# Allegro board SmartRing.brd
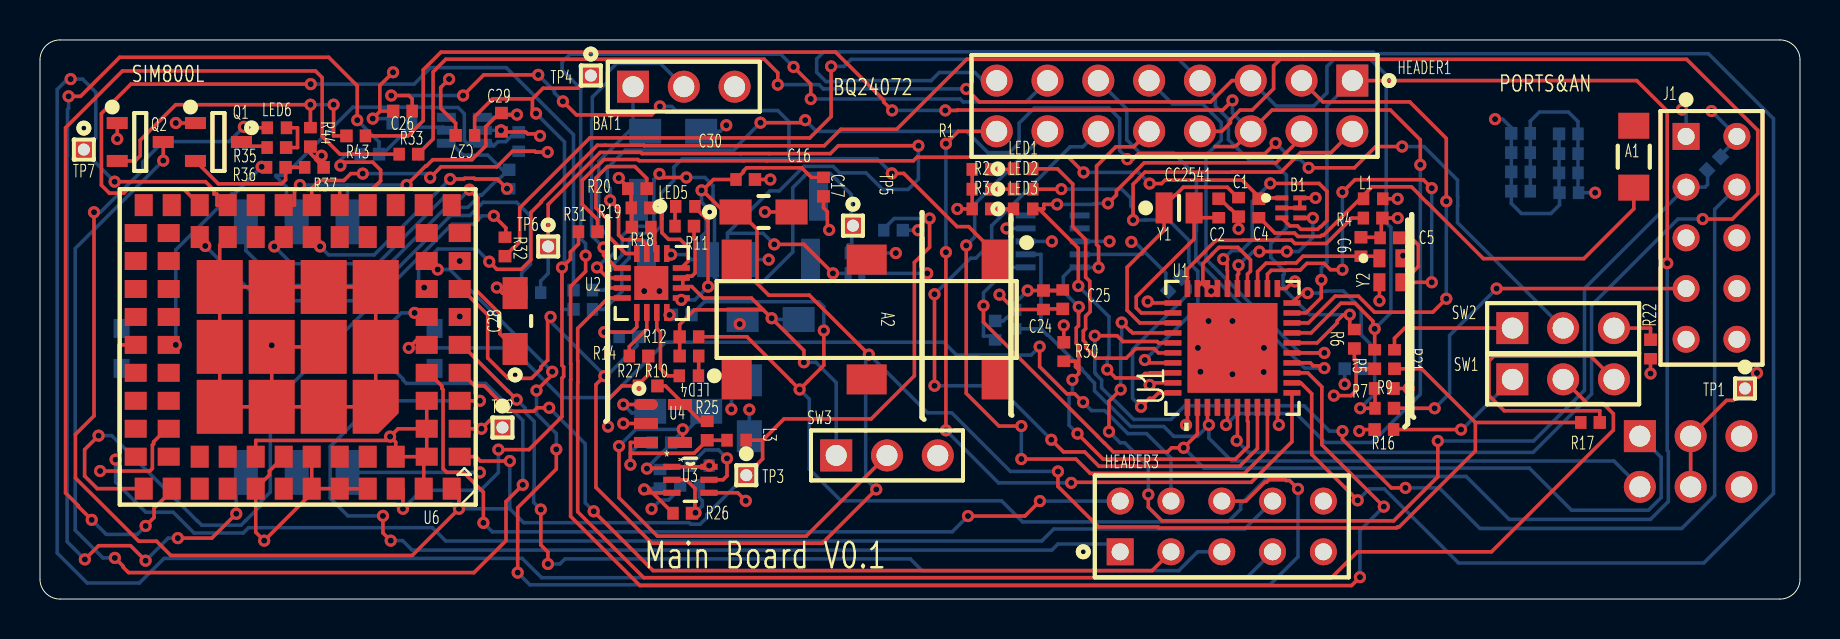
[diagram p0: board, top side]
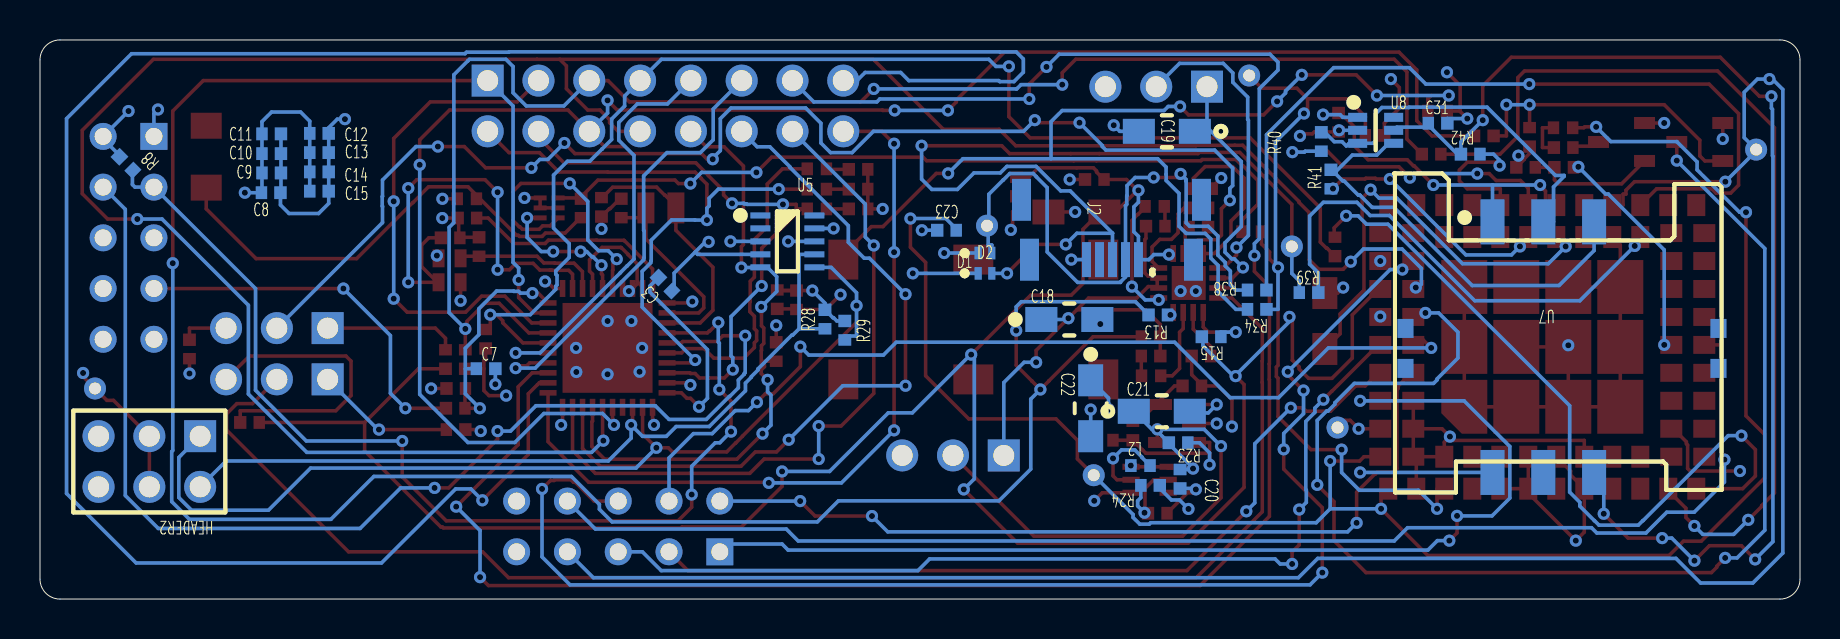
[diagram p1: board, bottom side, seen from below]

Outline 88 x 28 mm; copper layers: TOP, GND, POWER, BOTTOM. Coordinates in mm from the lower left corner of the outline.
Outline path: 0,27 arc(0.29,27.71) 1,28 87,28 arc(87.71,27.71) 88,27 88,1 arc(87.71,0.29) 87,0 1,0 arc(0.29,0.29) 0,1 0,27

## Placement (name value [footprint] x y rotation side)
A1  AN_SMD  [ANSMD3216]  79.69 22.15 90 top
A2  AN_SMD  [ANSMD_RAINSUN]  41.33 14 270 top
B1  Balun_LFB182G45BG2D280  [LFB182G45BG2D280]  62.54 19.59 0 top
BAT1  3.7V-LiPo  [BAT]  29.65 25.66 0 top
C1  15pF  [C0402]  59.93 19.61 270 top
C2  15pF  [C0402]  58.94 19.59 90 top
C3  1uF  [C0402]  56.75 15.78 45 bottom
C4  1.2pF  [C0402]  60.94 19.59 90 top
C5  12pF  [C0402]  67.5 18.09 0 top
C6  12pF  [C0402]  66.05 17.66 90 top
C7  1nF  [C0402]  65.69 11.54 180 bottom
C8  100nF  [C0402]  76.44 20.35 180 bottom
C9  100nF  [C0402]  76.41 21.34 180 bottom
C10  100nF  [C0402]  76.41 22.31 180 bottom
C11  100nF  [C0402]  76.41 23.3 180 bottom
C12  200pF  [C0402]  74.02 23.32 180 bottom
C13  2.2uF  [C0402]  74.02 22.36 180 bottom
C14  1uF  [C0402]  74.02 21.39 180 bottom
C15  100nF  [C0402]  74.02 20.43 180 bottom
C16  10uF/16V  [3216-18]  36.18 19.38 0 top
C17  0.1uF  [C0402]  39.18 20.63 270 top
C18  10uF/6.3V  [3216-18]  36.53 14 180 bottom
C19  10uF/6.3V  [3216-18]  31.66 23.42 0 bottom
C20  0.1uF  [C0402]  31 6 270 bottom
C21  10uF/6.3V  [3216-18]  31.91 9.4 180 bottom
C22  10uF/6.3V  [3216-18]  35.47 9.55 270 bottom
C23  0.1uF  [C0402]  42.68 18.47 0 bottom
C24  0.1uF  [C0402]  50.17 14.99 90 top
C25  0.1uF  [C0402]  51.14 14.99 270 top
C26  ?nF  [C0402]  18.12 24.44 180 top
C27  ?nF  [C0402]  21.24 23.22 180 top
C28  100uF/6.3V  [3216-18]  23.76 13.92 90 top
C29  1uF  [C0402]  23.07 23.88 90 top
C30  0.1uF  [C0402]  35.29 21.01 0 top
C31  22pF  [C0402]  18.09 23.83 180 bottom
D1  NM  [PESD5V0S1BL]  40.75 17.33 180 bottom
D2  NM  [PESD5V0S1BL]  40.75 16.31 180 bottom
HEADER1  PORTS  [HEADER8X2]  65.62 25.96 180 top
HEADER2  POWER  [HEADER3X2]  79.99 8.16 0 bottom
HEADER3  HEADER2x5  [HEADER5X2_1]  54.01 2.37 0 top
J1  CC_Debugger  [HEADER5X2_1]  82.3 23.17 270 top
J2  USB_MINI  [MICROUSB]  34.43 19.99 90 bottom
L1  ? nH  [L0402]  66.66 20.05 180 top
L2  4.7uH  [L0402]  32.98 6.68 180 bottom
L3  4.7uH  [L0402]  34.83 7.95 0 top
LED1  RED  [LED0402]  49.16 21.54 0 top
LED2  GRE  [LED0402]  49.16 20.53 0 top
LED3  BLU  [LED0402]  49.16 19.54 0 top
LED4  RED  [LED0402]  32.44 11.18 180 top
LED5  YEL  [LED0402]  32.27 19.66 0 top
LED6  GRE  [LED0402]  11.84 23.6 0 top
NOREF  -  []  1 28 0 top
NOREF#2  -  []  88 1 90 top
Q1  -  [S9013-SOT-23]  8.92 22.89 0 top
Q2  -  [S9013-SOT-23]  5.01 22.89 0 top
R1  330R  [R0402]  47.1 21.52 0 top
R2  330R  [R0402]  47.1 20.53 0 top
R3  330R  [R0402]  47.1 19.54 0 top
R4  56K-1%  [R0402]  66.66 19.08 0 top
R5  4.7K  [R0402]  66.73 11.99 270 top
R6  4.7K  [R0402]  65.72 13.01 270 top
R7  2K7  [R0402]  67.22 10.55 0 top
R8  10K  [R0402]  83.7 21.82 45 bottom
R9  2K7  [R0402]  67.24 9.55 0 top
R10  10K  [R0402]  32.44 12.17 180 top
R11  10K  [R0402]  32.24 18.67 0 top
R12  10K  [R0402]  32.44 13.14 180 top
R13  20K  [R0402]  32.11 14.23 0 bottom
R14  1K  [R0402]  29.95 12.17 0 top
R15  10K  [R0402]  29.45 13.14 0 bottom
R16  1K  [R0402]  67.19 8.49 180 top
R17  10K  [R0402]  77.53 8.84 0 top
R18  46.4K-1%  [R0402]  30.06 18.62 180 top
R19  1.18K-1%  [R0402]  30.06 19.59 0 top
R20  1.13K-1%  [R0402]  29.88 20.55 0 top
R21  10K  [R0402]  67.72 11.99 270 top
R22  1K  [R0402]  80.53 12.53 90 top
R23  ?R  [R0402]  31.1 7.83 0 bottom
R24  124K-1%  [R0402]  32.47 5.69 180 bottom
R25  4.99K-1%  [R0402]  33.36 8.41 270 top
R26  27K-1%  [R0402]  32.14 4.3 0 top
R27  1K-1%  [R0402]  30.41 10.67 0 top
R28  4.7K  [R0402]  48.75 14.03 90 bottom
R29  4.7K  [R0402]  47.76 13.47 90 bottom
R30  4.7K  [R0402]  51.19 12.4 90 top
R31  0R  [R0402]  27.41 18.39 0 top
R32  22R  [R0402]  23.25 17.63 270 top
R33  22R  [R0402]  18.45 22.28 0 top
R34  ?R  [R0402]  27.14 14.51 180 bottom
R35  1K  [R0402]  11.84 22.61 0 top
R36  1K  [R0402]  11.82 21.62 0 top
R37  10K  [R0402]  13.72 21.62 0 top
R38  22R  [R0402]  27.14 15.47 180 bottom
R39  22R  [R0402]  24.54 15.35 180 bottom
R40  22R  [R0402]  23.94 22.92 90 bottom
R41  22R  [R0402]  23.45 21.04 90 bottom
R42  22R  [R0402]  16.49 22.28 0 bottom
R43  1K  [R0402]  15.78 23.19 180 top
R44  10K  [R0402]  13.52 23.12 270 top
SW1  BQ24072_nCE  [SW]  73.62 11 0 top
SW2  BQ24072_TD  [SW]  73.62 13.57 0 top
SW3  ON/OFF  [SW]  39.81 7.19 0 top
TP1  TP  [TP1]  85.25 10.55 0 top
TP2  TP  [TP1]  23.12 8.59 0 top
TP3  TP  [TP1]  35.31 6.2 0 top
TP4  TP  [TP1]  27.54 26.22 0 top
TP5  TP  [TP1]  40.65 18.7 0 top
TP6  TP  [TP1]  25.41 17.66 0 top
TP7  TP  [TP1]  2.19 22.51 0 top
U1  CC2541-VQFN  [CC2541]  59.62 12.58 90 top
U2  BQ24072-QFN  [BQ24072]  30.59 15.83 0 top
U3  -  [TPS61220DCKR]  32.52 5.97 0 top
U4  MAX8515  [MAX8515AEXK-T]  31.15 8.79 0 top
U5  MC3200-VQFN  [MC3210]  50.63 17.91 180 bottom
U6  -  [SIM800L]  12.89 12.63 180 top
U7  SIM_Card  [SIMCARD]  12.89 12.55 90 bottom
U8  -  [SMF05C]  21.22 23.47 180 bottom
Y1  32.768KHz  [Y_FC_12M]  56.96 19.59 0 top
Y2  32MHz  [FA-118T]  67.52 16.46 0 top

## Library data of the parts
A1 = AN_SMD_1
A2 = AN_SMD_0
B1 = Balun_LFB182G45BG2D280
BAT1 = BAT-LiPo
C1-C15 C17 C20 C23-C27 C29-C31 = CAP-NP
C16 C18 C19 C21 C22 C28 = CAP-POL
D1 D2 = D_ZENER
HEADER1 = HEADER2x8
HEADER2 = HEADER2x3
HEADER3 = HEADER2x5
J1 = CC_Debugger
J2 = USB_MINI
L1-L3 = L
LED1-LED6 = LED
Q1 Q2 = NPN
R1-R44 = R
SW1 SW2 = Switch_1
SW3 = Switch
TP1-TP7 = TP
U1 = CC2541
U2 = BQ24072
U3 = TPS6122x
U4 = MAX8515
U5 = MC3210
U6 = SIM800L
U7 = SIM_Card
U8 = SMF05C
Y1 = Crystal_2PIN
Y2 = Crystal_4PIN_US

## Footprints (pads in the part's own frame, mm; a bottom-side part is the same pattern mirrored in y, then rotated)
3216-18
  rect 1.6x1.25 smd: 1(-1.4,0) 2(1.4,0)
ANSMD3216
  rect 1.3x1.55 smd: 1(-1.55,0) 2(1.55,0)
ANSMD_RAINSUN
  rect 2x1.5 smd: 1(-3,6.5) 3(-3,-6.5) 4(3,-6.5) 6(3,6.5)
  rect 1.5x2 smd: 2(-3,0) 5(3,0)
BAT
  rect 1.6x1.6 hole 1.05: 1(0,0)
  round 1.6 hole 1.05: 2(2.54,0) 3(5.08,0)
BQ24072
  rect 0.85x0.28 smd: 1(-1.475,0.75) 2(-1.475,0.25) 3(-1.475,-0.25) 4(-1.475,-0.75) 9(1.475,-0.75) 10(1.475,-0.25) 11(1.475,0.25) 12(1.475,0.75)
  rect 0.28x0.85 smd: 5(-0.75,-1.475) 6(-0.25,-1.475) 7(0.25,-1.475) 8(0.75,-1.475) 13(0.75,1.475) 14(0.25,1.475) 15(-0.25,1.475) 16(-0.75,1.475)
  rect 1.7x1.7 smd: 17(-0.025,0)
C0402
  rect 0.57x0.64 smd: 1(-0.49,0)
  rect 0.62x0.64 smd: 2(0.46,0)
CC2541
  rect 0.85x0.28 smd: 1(-2.975,2.25) 2(-2.975,1.75) 3(-2.975,1.25) 4(-2.975,0.75) 5(-2.975,0.25) 6(-2.975,-0.25) 7(-2.975,-0.75) 8(-2.975,-1.25) 9(-2.975,-1.75) 10(-2.975,-2.25) 21(2.975,-2.25) 22(2.975,-1.75) 23(2.975,-1.25) 24(2.975,-0.75) 25(2.975,-0.25) 26(2.975,0.25) 27(2.975,0.75) 28(2.975,1.25) 29(2.975,1.75) 30(2.975,2.25)
  rect 0.28x0.85 smd: 11(-2.25,-2.975) 12(-1.751,-2.975) 13(-1.25,-2.975) 14(-0.75,-2.975) 15(-0.25,-2.975) 16(0.25,-2.975) 17(0.75,-2.975) 18(1.25,-2.975) 19(1.751,-2.975) 20(2.25,-2.975) 31(2.25,2.975) 32(1.751,2.975) 33(1.25,2.975) 34(0.75,2.975) 35(0.25,2.975) 36(-0.25,2.975) 37(-0.75,2.975) 38(-1.25,2.975) 39(-1.751,2.975) 40(-2.25,2.975)
  rect 4.5x4.5 smd: 41(0,0)
FA-118T
  rect 0.6x0.9 smd: 1(-0.55,0.6) 2(-0.55,-0.6) 3(0.55,-0.6) 4(0.55,0.6)
HEADER3X2
  rect 1.6x1.6 hole 1.05: 1(0,0)
  round 1.6 hole 1.05: 2(0,2.54) 3(2.54,0) 4(2.54,2.54) 5(5.08,0) 6(5.08,2.54)
HEADER5X2_1
  rect 1.35x1.35 hole 0.85: 1(0,0)
  round 1.35 hole 0.85: 2(0,2.54) 3(2.54,0) 4(2.54,2.54) 5(5.08,0) 6(5.08,2.54) 7(7.62,0) 8(7.62,2.54) 9(10.16,0) 10(10.16,2.54)
HEADER8X2
  rect 1.6x1.6 hole 1.05: 1(0,0)
  round 1.6 hole 1.05: 2(0,2.54) 3(2.54,0) 4(2.54,2.54) 5(5.08,0) 6(5.08,2.54) 7(7.62,0) 8(7.62,2.54) 9(10.16,0) 10(10.16,2.54) 11(12.7,0) 12(12.7,2.54) 13(15.24,0) 14(15.24,2.54) 15(17.78,0) 16(17.78,2.54)
L0402
  rect 0.57x0.64 smd: 1(-0.48,0) 2(0.48,0)
LED0402
  rect 0.57x0.64 smd: 1(-0.48,0) 2(0.48,0)
LFB182G45BG2D280
  rect 0.65x0.25 smd: 1(-0.45,0.5) 2(-0.45,0) 3(-0.45,-0.5) 4(0.45,-0.5) 5(0.45,0) 6(0.45,0.5)
MAX8515AEXK-T
  oval 1.2x0.55 smd: 1(-0.85,0.95)
  rect 1.2x0.55 smd: 2(-0.85,0) 3(-0.85,-0.95) 4(0.85,-0.95) 5(0.85,0.95)
MC3210
  rect 1x0.3 smd: 1(-1.35,1.3) 2(-1.35,0.65) 3(-1.35,0) 4(-1.35,-0.65) 5(-1.35,-1.3) 6(1.35,-1.3) 7(1.35,-0.65) 8(1.35,0) 9(1.35,0.65) 10(1.35,1.3)
MICROUSB
  rect 2.1x0.95 smd: (-3,-4.1) (-3,4.1) (0,-4.5) (0,4.5)
  rect 1.75x0.45 smd: 1(-2.998,-1.347) 2(-2.995,-0.7) 3(-2.995,-0.05) 4(-2.995,0.6) 5(-2.995,1.25)
PESD5V0S1BL
  rect 0.36x0.63 smd: 1(-0.34,0) 2(0.34,0)
R0402
  rect 0.57x0.64 smd: 1(-0.49,0)
  rect 0.62x0.64 smd: 2(0.46,0)
S9013-SOT-23
  rect 1.05x0.6 smd: 1(-1.15,0.95) 2(-1.15,-0.95) 3(1.15,0)
SIM800L
  rect 1.1x0.9 smd: 1(-8.1,5.5) 2(-8.1,4.1) 3(-8.1,2.7) 4(-8.1,1.3) 5(-8.1,-0.1) 6(-8.1,-1.5) 7(-8.1,-2.9) 8(-8.1,-4.3) 9(-8.1,-5.7) 22(8.1,-5.7) 23(8.1,-4.3) 24(8.1,-2.9) 25(8.1,-1.5) 26(8.1,-0.1) 27(8.1,1.3) 28(8.1,2.7) 29(8.1,4.1) 30(8.1,5.5) 43(-6.45,5.5) 44(-6.45,4.1) 45(-6.45,2.7) 46(-6.45,1.3) 47(-6.45,-0.1) 48(-6.45,-1.5) 49(-6.45,-2.9) 50(-6.45,-4.3) 51(-6.45,-5.7) 60(6.45,-5.7) 61(6.45,-4.3) 62(6.45,-2.9) 63(6.45,-1.5) 64(6.45,-0.1) 65(6.45,1.3) 66(6.45,2.7) 67(6.45,4.1) 68(6.45,5.5)
  rect 0.9x1.1 smd: 10(-7.7,-7.1) 11(-6.3,-7.1) 12(-4.9,-7.1) 13(-3.5,-7.1) 14(-2.1,-7.1) 15(-0.7,-7.1) 16(0.7,-7.1) 17(2.1,-7.1) 18(3.5,-7.1) 19(4.9,-7.1) 20(6.3,-7.1) 21(7.7,-7.1) 31(7.7,7.1) 32(6.3,7.1) 33(4.9,7.1) 34(3.5,7.1) 35(2.1,7.1) 36(0.7,7.1) 37(-0.7,7.1) 38(-2.1,7.1) 39(-3.5,7.1) 40(-4.9,7.1) 41(-6.3,7.1) 42(-7.7,7.1) 52(-4.9,-5.5) 53(-3.5,-5.5) 54(-2.1,-5.5) 55(-0.7,-5.5) 56(0.7,-5.5) 57(2.1,-5.5) 58(3.5,-5.5) 59(4.9,-5.5) 69(4.9,5.5) 70(3.5,5.5) 71(2.1,5.5) 72(0.7,5.5) 73(-0.7,5.5) 74(-2.1,5.5) 75(-3.5,5.5) 76(-4.9,5.5)
  custom 2.3x2.7 smd: 77(-3.9,3)
  rect 2.3x2.7 smd: 78(-3.9,0) 79(-3.9,-3) 80(-1.3,-3) 81(1.3,-3) 82(3.9,-3) 83(3.9,0) 84(3.9,3) 85(1.3,3) 86(-1.3,3) 87(-1.3,0) 88(1.3,0)
SIMCARD
  rect 0.95x0.8 smd: (-1,-8.81) (-1,6.84) (1,-8.81) (1,6.84)
  rect 2.25x1.2 smd: 1(6.338,2.489) 2(6.338,-0.051) 3(6.338,-2.591) 4(-6.211,2.489) 5(-6.211,-0.051) 6(-6.211,-2.591)
SMF05C
  rect 0.95x0.45 smd: 1(-0.9,0.65) 2(-0.9,0) 3(-0.9,-0.65) 4(0.9,-0.65) 5(0.9,0) 6(0.9,0.65)
SW
  rect 1.6x1.6 hole 1.05: 1(0,0)
  round 1.6 hole 1.05: 2(2.54,0) 3(5.08,0)
TP1
  round 1.1 hole 0.6: 1(0,0)
TPS61220DCKR
  rect 0.864x0.305 smd: 1(-0.927,0.65) 2(-0.927,0) 3(-0.927,-0.65) 4(0.927,-0.65) 5(0.927,0) 6(0.927,0.65)
Y_FC_12M
  rect 0.85x1.55 smd: 1(-0.75,0) 2(0.75,0)

## Nets
DGND: B1.2 B1.5 B1.6 BAT1.3(GND) C1.2 C2.2 C3.1 C5.1 C6.2 C7.2 C8.2 C9.2 C10.2 C11.2 C12.2 C13.2 C14.2 C15.2 C16.2 C17.2 C18.2 C19.2 C20.2 C21.2 C22.2 C23.2 C24.1 C25.2 C26.2 C27.2 C28.2 C29.1 C30.2 C31.2 D1.1(ANODE) D2.1(ANODE) HEADER2.5 HEADER2.6 HEADER3.9 HEADER3.10 J1.1(GND) J2.5(GND) L1.1 Q1.1(EMITTER) Q2.1(EMITTER) R4.2 R13.1 R14.2 R16.2 R18.2 R19.1 R20.1 R22.1 R26.1 R27.1 R37.2 R44.2 TP2.1 U1.1(GND#1) U1.41(GND#41) U2.8(VSS) U2.17(GNDPAD) U3.3(GND) U4.1(PGND) U4.2(GND) U5.4(VPP) U5.8(GND) U6.2(GND#2) U6.6(GND#6) U6.8(GND#8) U6.35(GND#35) U6.37(GND#37) U6.38(GND#38) U6.39(GND#39) U6.41(GND#41) U6.43(GND#43) U6.44(GND#44) U6.45(GND#45) U6.58(GND#58) U6.67(GND#67) U6.71(GND#71) U6.72(GND#72) U6.73(GND#73) U6.76(GND#76) U6.77(GND#77) U6.78(GND#78) U6.79(GND#79) U6.80(GND#80) U6.81(GND#81) U6.82(GND#82) U6.83(GND#83) U6.84(GND#84) U6.85(GND#85) U6.86(GND#86) U6.87(GND#87) U6.88(GND#88) U7.4(GND) U8.2 Y2.2 Y2.4
DVDD2V8: C8.1 C9.1 C10.1 C11.1 C12.1 C13.1 C14.1 C15.1 C22.1 C24.2 C25.1 HEADER2.3 HEADER2.4 J1.2(VCC) R1.1 R2.1 R3.1 R5.2 R6.2 R7.2 R8.2 R24.2 R28.2 R29.2 R30.2 TP1.1 U1.10(DVDD2) U1.21(AVDD5) U1.24(AVDD3) U1.27(AVDD2) U1.28(AVDD1) U1.29(AVDD4) U1.31(AVDD6) U1.39(DVDD1) U3.4(VOUT) U5.3(AVDD) U5.9(DVDD)
DVDD3V6: C23.1 L3.2 LED6.1(ANODE) TP3.1 U6.1(VBAT#1) U6.42(VBAT#42)
VDDEXT: HEADER3.7 TP7.1 U6.18(VDDEXT)
ADC: HEADER3.6 U6.50(ADC)
BAT: C18.1 R10.2 R11.2 R12.2 SW3.1(COMMON) U2.10(OUT_1) U2.11(OUT_2)
BAT_ADC: HEADER1.1 R12.1 R13.2 U1.19(P0_0)
BAT_IN: C20.1 C21.1 L2.1 R23.2 SW3.2(NC) U3.1(VIN) U3.6(EN) U4.4(IN)
BPI_BUS: HEADER3.5 U6.5(BPI_BUS)
BQ24072_NCE: SW1.2 U2.4(C\E\)
BQ24072_TD: SW2.2 U2.15(TD)
BT_ANT: B1.1 C4.2 R31.2
CC2541_RF_N: B1.3 U1.26(RF_N)
CC2541_RF_P: B1.4 U1.25(RF_P)
CHG: LED5.2(CATHODE) U2.9(C\H\G\)
DC: J1.3(DC) R8.1 U1.34(P2_2/DC)
DD: J1.4(DD) U1.35(P2_1/DD)
GPIO1: HEADER3.1 U6.3(GPIO1)
MC3210_INT: HEADER1.10 R30.1 U1.7(P1_3) U5.5(INTN)
MC3210_SCK: HEADER2.1 R29.1 U1.2(SCL) U5.6(SCK)
MC3210_SDA: HEADER2.2 R28.1 U1.3(SDA) U5.7(SDA)
NRST: J1.7(NRST) R9.2
P0_1/AD1: HEADER1.3 U1.18(P0_1)
P0_4/AD4: HEADER1.9 U1.15(P0_4)
P0_5/AD5: HEADER1.11 U1.14(P0_5)
P0_6/AD6: HEADER1.13 U1.13(P0_6)
P0_7/AD7: HEADER1.15 U1.12(P0_7)
P1_0: HEADER1.16 U1.11(P1_0)
P1_1: HEADER1.14 U1.9(P1_1)
P1_2: HEADER1.12 U1.8(P1_2)
P1_6: HEADER1.4 LED3.2(CATHODE) U1.38(P1_6)
P1_7: HEADER1.2 LED2.2(CATHODE) U1.37(P1_7)
P2_0: LED1.2(CATHODE) U1.36(P2_0)
PG: LED4.2(CATHODE) U2.7(P\G\)
PWM: HEADER3.8 U6.26(PWM)
SIM800_PK: HEADER1.6 R43.1 U1.5(P1_5)
SIM800_RST: HEADER1.8 U1.6(P1_4) U6.49(RESET)
SIM800_RXD: R32.1 U6.31(RXD)
SIM800_TXD: R33.1 U6.32(TXD)
SIM_CLK: R41.2 U7.3(CLK) U8.4
SIM_DATA: C31.1 R42.2 U7.6(IO) U8.5
SIM_RST: R40.2 U7.2(RST) U8.3
SINK0: HEADER3.4 U6.47(ISINK0)
SINK1: HEADER3.2 U6.46(ISINK1)
STATUS: HEADER3.3 U6.4(STATUS)
USART_RXD: HEADER1.5 R5.1 R33.2 U1.17(P0_2)
USART_TXD: HEADER1.7 R6.1 R32.2 U1.16(P0_3)
USB_5V: C16.1 C17.1 C30.1 J2.1(VBUS) R15.2 R17.1 R21.2 U2.13(IN) U6.7(VBUS)
USB_DM: D1.2(CATHODE) J2.2(D-) R38.1 TP5.1
USB_DP: D2.2(CATHODE) J2.3(D+) R39.1 TP6.1
VSIM: C29.2 U6.16(VSIM) U7.1(VCC) U8.1
N12835: C1.1 U1.33(P2_3/OSC32K_Q2) Y1.1
N12841: C2.1 U1.32(P2_4/OSC32K_Q1) Y1.2
N13149: R4.1 U1.30(RBIAS)
N13333: C3.2 U1.40(DCOUPL)
N14357: C6.1 U1.23(XOSC_Q2) Y2.1
N14367: C5.2 U1.22(XOSC_Q1) Y2.3
N19377: C7.1 R7.1 R9.1 U1.20(RST_N)
N42343: A1.1(ANT) C4.1 L1.2
N47831: R24.1 R26.2 U3.2(FB)
N59946: Q2.3(COLLECTOR) U6.48(PWRKEY)
N60165: Q2.2(BASE) R43.2 R44.1
N62144: R38.2 U6.19(USB_DM)
N62148: R39.2 U6.59(USB_DP)
N62630: R42.1 U6.14(SIM_DATA)
N62665: R41.1 U6.55(SIM_CLK)
N62680: R40.1 U6.15(SIM_RST)
N65838: R36.1 U6.64(NETLIGHT)
N65858: Q1.2(BASE) R36.2 R37.1
N67494: A2.1(ANT) C26.1 R34.1
N67529: C27.1 R31.1 R34.2 TP4.1 U6.40(ANT)
N77579: L3.1 R23.1 R25.2 U4.3(OUT)
N88391: LED2.1(ANODE) R2.2
N88395: LED1.1(ANODE) R1.2
N88411: LED3.1(ANODE) R3.2
N122459: BAT1.1(BAT+) C19.1 U2.2(BAT_1) U2.3(BAT_2)
N122468: BAT1.2(TS) U2.1(TS)
N122830: R15.1 U2.5(EN2)
N123132: R14.1 U2.6(EN1)
N128065: LED5.1(ANODE) R11.1
N128069: LED4.1(ANODE) R10.1
N477050: L2.2 U3.5(L)
N546190: R19.2 U2.12(ILIM)
N547230: R20.2 U2.16(ISET)
N547391: R18.1 U2.14(TMR)
N658042: Q1.3(COLLECTOR) R35.1
N659580: LED6.2(CATHODE) R35.2
N773363: R25.1 R27.2 U4.5(FB)
N1023186: C28.1 U6.56(VRTC)
N1278610: R16.1 SW1.1
N1278612: R17.2 SW1.3
N1284310: R21.1 SW2.1
N1284312: R22.2 SW2.3

Pads without a net: A1 2; A2 2 3 4 5 6; J1 5 6 8 9 10; J2 4; SW3 3; U1 4; U5 1 2 10; U6 9 10 11 12 13 17 20 21 22 23 24 25 27 28 29 30 33 34 36 51 52 53 54 57 60 61 62 63 65 66 68 69 70 74 75; U7 5; U8 6

## Via types
v1: diameter 0.61, hole 0.305, TOP to BOTTOM, 256 vias

## Routing (per net, layer and track width the routed paths; a pad name or vN(x,y) marks a point on that pad's centre or on a via; arc(x,y) is an arc through that point)
DGND: length 205.4
  TOP w0.178: 16.99,24.44 C26.2 ; 16.99,24.44 16.99,25.72 v1(17.65,26.38) ; 16.99,24.44 16.99,24.42 v1(16.64,24.06) ; U6.37 13.59,5.3 v1(11.21,2.93) 10.79,3.35 U6.35 11.47,6.21 11.47,6.41 U6.72 ; U6.37 U6.73 ; U6.37 U6.38 U6.39 16.04,5.19 16.04,5.19 ; 59.22,12.58 v1(57.89,12.58) ; 59.22,12.58 v1(58.02,11.38) ; 59.22,12.58 U1.41 ; v1(36.52,21.01) C30.2 ; C17.2 39.18,19.59 39.37,19.4 39.37,18.58 v1(39.46,18.49) ; v1(67.89,19.08) R4.2 67.06,19.03 67.06,18.18 67.01,18.12 ; v1(3.01,6.41) 5.49,6.41 5.62,6.54 5.62,7.71 5.68,7.77 5.68,7.87 6.34,8.53 U6.67 ; v1(25,23.19) 24.9,23.3 24.38,23.3 24.29,23.39 C29.1 23.05,23.41 v1(23.05,23.47) ; U6.2 v1(22.07,8.53) 22.49,8.95 22.76,8.95 TP2.1 ; U6.82 U6.83 U6.84 U6.85 ; U6.82 U6.81 U6.80 U6.79 U6.78 U6.77 U6.86 U6.85 ; U6.82 8.99,17.73 U6.58 ; v1(65.96,8.41) 66.04,8.49 R16.2 ; 30.22,5.49 v1(30.21,5.49) ; 30.22,5.49 30.46,5.49 R26.1 ; 30.22,5.49 30.39,5.32 U3.3 ; v1(31.48,14.23) 31.35,14.35 U2.8 ; U1.41 v1(59.62,11.26) ; U1.41 60.94,11.61 ; U1.41 59.62,12.73 ; U1.41 59.98,12.58 ; U6.85 U6.88 ; U6.88 v1(11.59,12.71) ; U6.88 U6.87 ; U6.43 19.19,6.98 U6.41 ; U6.43 U6.76 17.79,7.85 v1(17.5,8.14) ; U6.43 U6.44 ; v1(28.4,8.64) 28.4,9.98 29.09,10.67 R27.1 29.98,10.73 29.98,10.8 30.41,11.23 R14.2 ; C25.2 50.17,14.53 C24.1 48.72,14.5 v1(47.97,15.24) ; U6.45 U6.44 ; U6.44 17.9,8.53 v1(17.5,8.14) ; C5.1 67.01,18.12 ; 67.01,18.12 C6.2 ; v1(63.78,20.09) B1.6 B1.5 B1.2 ; v1(68.16,17.2) 68.07,17.12 Y2.4 ; C28.2 23.12,15.32 v1(22.84,15.6) ; C27.2 20.78,23.83 20.03,24.58 20.03,25.62 v1(20.46,26.04) ; C2.2 59,20.05 59.5,19.55 59.53,19.55 C1.2 v1(59.93,18.54) ; R18.2 29.6,19.56 R19.1 29.57,20.38 R20.1 29.39,20.64 v1(28.94,21.09) ; 59.98,12.58 v1(61.2,12.58) ; 59.98,12.58 60.94,11.61 ; R44.2 13.52,22.32 13.79,22.05 13.79,22.02 R37.2 14.18,22.1 v1(14.08,22.2) ; 59.62,12.73 v1(59.62,13.92) ; 59.62,12.73 v1(58.43,13.92) ; 60.94,11.61 v1(61.18,11.37) ; U6.6 v1(20.99,14.15) ; U1.1 57.37,8.79 v1(57.3,8.72) ; v1(17.5,8.14) 17.31,7.95 10.79,7.95 U6.71 ; Y2.2 v1(66.97,14.94) ; v1(30.21,15.42) 30.31,15.52 30.31,15.57 U2.17 v1(30.97,15.42) ; Q2.1 v1(3.86,23.04) ; R22.1 v1(80.53,11.29) ; Q1.1 v1(6.79,23.84) ; U4.2 v1(29.17,8.79) ; L1.1 v1(67.88,20.05) ; C16.2 v1(36.24,19.38) ; U4.1 v1(29.17,9.74)
  GND w0.178: 34.73,24.6 BAT1.3 ; BAT1.3 34.73,26.71 ; BAT1.3 33.68,25.66 ; BAT1.3 35.78,25.66 ; HEADER2.5 86.13,8.16 ; HEADER2.5 84.02,8.16 ; HEADER2.5 85.07,9.21 ; HEADER2.5 85.07,7.1 ; 22.08,23.5 22.19,23.39 24.29,23.39 24.38,23.3 24.9,23.3 v1(25,23.19) ; 64.17,3.98 HEADER3.10 ; HEADER3.10 63.24,4.91 ; HEADER3.10 64.17,5.84 ; HEADER3.10 65.1,4.91 ; 82.3,22.24 J1.1 ; J1.1 83.23,23.17 ; J1.1 82.3,24.1 ; J1.1 81.38,23.17 ; HEADER2.6 85.07,6.67 ; HEADER2.6 86.13,5.62 ; HEADER2.6 85.07,4.56 ; HEADER2.6 84.02,5.62 ; TP2.1 23.12,9.39 ; TP2.1 22.32,8.59 ; TP2.1 23.93,8.59 ; 64.17,1.44 HEADER3.9 ; HEADER3.9 64.17,3.3 ; HEADER3.9 65.1,2.37 ; HEADER3.9 63.24,2.37 ; 30.01,15.42 v1(30.21,15.42) v1(30.97,15.42)
  BOTTOM w0.178: v1(54.57,17.89) 54.73,17.89 55.24,17.38 ; U8.2 v1(23.05,23.47) ; C7.2 v1(65.23,10.76) ; v1(34.98,13.77) 35.13,13.92 C18.2 ; C23.2 v1(43.91,18.47) ; v1(29.17,9.74) 29.59,9.32 30.43,9.32 C21.2 ; R13.1 v1(31.48,14.23) ; v1(34.31,23.73) 34.01,23.42 C19.2 ; U5.4 55.12,17.26 55.24,17.38 ; D2.1 v1(44.36,16.31) ; 55.24,17.38 56.29,16.33 56.29,15.43 C3.1 ; v1(82.1,24.52) 82.3,24.31 J1.1 ; C31.2 17.63,24.06 v1(16.64,24.06) ; C22.2 v1(35.47,9.49) ; C11.2 C10.2 C9.2 75.95,20.38 C8.2 75.98,19.74 75.55,19.31 74.07,19.31 73.56,19.81 C15.2 C14.2 C13.2 C12.2 73.56,23.6 73.13,24.03 v1(72.75,24.03) ; U7.4 v1(21.99,6.34) ; J2.5 v1(36.43,17) ; v1(30.21,5.49) 30.26,5.54 C20.2 ; U5.8 v1(50.59,17.91) ; D1.1 v1(42.79,17.33)
  vias: v1(20.99,16.93)
DVDD2V8: length 69.2
  TOP w0.178: R1.1 R2.1 R3.1 v1(45.87,19.54) ; v1(64.69,10.19) 65.55,10.19 65.8,10.44 65.8,11.53 ; v1(55.38,14.9) 55.46,14.83 U1.31 ; U1.10 61.87,8.79 v1(61.94,8.72) ; U1.21 62.3,15.55 62.66,15.9 v1(62.75,15.9) ; 65.8,11.53 R5.2 ; 65.8,11.53 65.8,11.97 65.72,11.97 R6.2 ; 58.33,15.6 58.33,15.6 U1.28 58.42,15.55 v1(58.56,15.42) ; 58.33,15.6 58.82,15.6 U1.27 ; 58.33,15.6 58.14,15.78 58.14,15.9 ; 58.14,15.9 58.14,16.8 58.59,17.25 58.59,17.26 58.93,17.59 58.94,17.59 58.96,17.61 59.9,17.61 60.52,16.98 60.52,16.42 60.37,16.27 U1.24 ; 58.14,15.9 57.87,15.63 U1.29 ; U1.39 55.59,10.83 v1(55.48,10.72) ; v1(35.29,4.92) 34.88,5.32 U3.4 ; C24.2 v1(49.38,15.45) ; HEADER2.4 HEADER2.3 84.32,9.95 84.66,9.95 TP1.1 85.85,11.14 v1(85.85,11.32) ; v1(51.19,13.7) R30.2 ; v1(68.44,10.55) R7.2
  TOP w0.203: C24.2 51.11,15.45 C25.1
  POWER w0.178: 81.48,5.62 HEADER2.4 ; HEADER2.4 82.53,4.56 ; HEADER2.4 83.59,5.62 ; HEADER2.4 82.53,6.67 ; J1.2 85.77,23.17 ; J1.2 84.84,22.24 ; J1.2 84.84,24.1 ; J1.2 83.92,23.17 ; TP1.1 86.05,10.55 ; TP1.1 85.25,11.35 ; TP1.1 84.45,10.55 ; TP1.1 85.25,9.74 ; HEADER2.3 83.59,8.16 ; HEADER2.3 81.48,8.16 ; HEADER2.3 82.53,9.21 ; HEADER2.3 82.53,7.1
  BOTTOM w0.178: v1(53.48,17.91) U5.3 ; v1(49.38,15.45) 48.75,14.82 R28.2 48.35,14.09 48.32,14.09 48.16,13.93 R29.2 ; v1(30.58,4.51) 31.03,4.96 31.43,4.96 32.01,5.55 R24.2 ; C22.1 34.57,10.06 34.57,9.81 34.57,9.8 v1(34.57,9.5) ; C15.1 C14.1 C13.1 C12.1 74.51,23.93 74.97,24.39 76.42,24.39 76.9,23.91 C11.1 C10.1 C9.1 76.9,20.38 C8.1 v1(77.76,20.35) ; U5.9 v1(48.32,18.56) ; v1(83.57,24.44) J1.2 84.51,22.84 84.51,22.71 84.03,22.22 R8.2
DVDD3V6: length 90.9
  TOP w0.178: LED6.1 10.81,23.6 10.77,23.65 v1(10.19,23.65) ; L3.2 36.13,7.95 ; 36.13,7.95 37.2,9.02 41.56,9.02 43.72,11.18 43.72,16.86 44.48,17.62 v1(44.48,19.06) ; 36.13,7.95 36.13,7.02 TP3.1 ; v1(23.49,6.91) 22.02,6.91 21.8,7.13 U6.1 ; v1(2.7,19.37) 2.7,9.17 1.77,8.25 1.77,6.06 4.94,2.9 5.82,2.9 6.54,2.18 18.61,2.18 v1(20.95,4.52) 20.95,5.53 U6.42
  BOTTOM w0.178: v1(23.49,6.91) 23.49,4.52 ; 23.49,4.52 v1(20.95,4.52) ; 23.49,4.52 24.19,3.82 32.47,3.82 32.54,3.75 33.01,3.75 33.35,4.09 33.35,4.23 TP3.1 ; v1(2.7,19.37) 3.02,19.37 5.14,21.5 5.14,21.89 6.16,22.91 9.46,22.91 v1(10.19,23.65) ; v1(44.48,19.06) 42.71,19.06 42.19,18.54 C23.1
VDDEXT: length 100.4
  TOP w0.178: v1(3.73,20.9) 8.28,20.9 8.7,20.47 8.7,20.28 8.85,20.28 8.85,19.73 U6.18
  BOTTOM w0.178: HEADER3.7 60.33,1.07 25.08,1.07 24.11,2.04 6.2,2.04 4.97,0.8 2.36,0.8 0.86,2.3 0.86,25.52 1.38,26.04 v1(1.53,26.04) 2.13,26.04 2.79,25.38 2.79,23.1 TP7.1 2.19,22.44 v1(3.73,20.9)
ADC: length 67.8
  TOP w0.178: HEADER3.6 60.3,4.91 61.24,5.85 61.33,5.85 61.45,5.97 62.26,5.97 62.3,5.94 62.48,5.94 v1(62.9,5.52) ; v1(19.88,16.5) 19.66,16.73 U6.50 ; v1(23.88,1.33) 23.88,4.58 25.81,6.51 v1(25.81,7.5) ; v1(25.61,11.38) 25.61,11.23 v1(24.82,10.44)
  BOTTOM w0.178: v1(24.82,10.44) 24.82,9.28 25.81,8.29 v1(25.81,7.5) ; v1(25.61,11.38) 20.49,16.5 v1(19.88,16.5) ; v1(62.9,5.52) 62.9,2.11 61.5,0.71 24.5,0.71 v1(23.88,1.33)
BAT: length 24.8
  TOP w0.178: v1(38.19,11.86) 38.19,12.45 v1(36.58,14.06) 36.16,14.49 ; 36.16,14.49 32.72,14.49 31.98,13.75 R12.2 R10.2 ; 36.16,14.49 35.57,15.07 33.17,15.07 32.59,15.65 32.2,15.65 32.17,15.63 32.14,15.63 ; 32.22,16.03 32.11,16.03 U2.11 ; 32.22,16.03 32.36,16.17 32.6,16.17 32.76,16.33 32.76,18.01 32.7,18.06 R11.2 ; 32.22,16.03 32.14,15.96 32.14,15.63 ; U2.10 32.11,15.63 32.14,15.63
  BOTTOM w0.178: SW3.1 39.81,10.84 38.79,11.86 v1(38.19,11.86) ; v1(36.58,14.06) 36.64,14 C18.1
BAT_ADC: length 117.6
  TOP w0.178: v1(81.36,16.82) 81.36,24.44 79.84,25.96 HEADER1.1 ; v1(64.07,15.98) 64.07,15.1 63.3,14.33 U1.19 ; R12.1 35.35,13.14 37.56,10.92 37.56,10.92 v1(37.98,10.49) 38.4,10.92 38.4,10.92 39.19,11.71 v1(39.19,13.45)
  BOTTOM w0.178: v1(81.36,16.82) 81.36,7.44 81.42,7.39 81.42,4.88 80.53,3.99 73.46,3.99 71.31,6.14 61.43,6.14 60.03,4.74 60.03,4.5 59.4,3.86 49.13,3.86 48.08,4.92 40.05,4.92 38.46,6.51 38.46,10.01 v1(37.98,10.49) ; v1(39.19,13.45) 39.19,14.64 38.94,14.89 33.23,14.89 32.57,14.24 R13.2 ; v1(64.07,15.98) 64.07,16.58 64.35,16.86 64.35,24.69 HEADER1.1
BAT_IN: length 30.9
  TOP w0.178: U3.6 U3.1 31.59,6.56 30.38,6.56 v1(30.35,6.53) ; U4.4 32.13,7.84 v1(32.13,8.5) ; v1(28.95,7.66) 28.95,5.07 30.87,3.15 38.31,3.15 SW3.2
  BOTTOM w0.178: C21.1 32.98,9.07 32.98,9.07 32.4,8.5 v1(32.13,8.5) ; v1(32.13,8.5) 32.13,8.4 R23.2 31.56,7.78 30.36,6.58 30.35,6.58 ; v1(32.13,8.5) 29.79,8.5 v1(28.95,7.66) ; v1(30.35,6.53) 30.35,6.58 ; 30.35,6.58 30.44,6.49 C20.1 ; L2.1 v1(33.46,6.68)
BPI_BUS: length 47.3
  TOP w0.178: U6.5 21.09,12.73 23.41,10.41 23.41,10.41 v1(23.83,9.99) ; v1(25.4,1.76) 25.4,2.35 25.04,2.71 v1(25.04,4.48)
  BOTTOM w0.178: HEADER3.5 57.88,2.37 56.94,1.43 44.1,1.43 43.52,2.01 26.25,2.01 25.99,1.76 v1(25.4,1.76) ; v1(23.83,9.99) 24.26,9.56 24.26,9.35 24.71,8.9 24.71,5.48 24.68,5.46 24.68,4.84 v1(25.04,4.48)
BQ24072_NCE: length 72.3
  TOP w0.178: SW1.2 77.37,9.79 78.16,9.79 78.67,9.28 78.67,8.46 72.57,2.37 65.87,2.37 64.57,1.07 30.19,1.07 26.89,4.37 26.89,10.84 26.89,10.85 26.89,11.92 26.89,11.92 26.89,13.55 28.41,15.08 U2.4
BQ24072_TD: length 65
  TOP w0.178: v1(68.11,22.66) 66.78,22.66 65.72,21.59 v1(63.43,21.59) ; v1(61.78,22.84) 61.25,22.31 54.92,22.31 54.64,22.03 v1(54.36,22.03) ; U2.15 30.34,17.75 30.09,18 29.16,18 28.93,18.23 28.93,19.55 v1(28.51,19.97) ; v1(36.03,23.86) 38.13,23.86 v1(38.26,23.98)
  BOTTOM w0.178: v1(36.03,23.86) 34.88,22.71 34.88,22.66 34.7,22.48 29.27,22.48 28.37,21.58 28.37,20.71 28.51,20.57 v1(28.51,19.97) ; v1(54.36,22.03) 54.36,22.08 53.98,22.46 53.98,24.06 53.45,24.59 49.72,24.59 48.95,23.83 48.95,22.84 48.47,22.36 47.39,22.36 46.33,23.42 38.82,23.42 v1(38.26,23.98) ; v1(68.11,22.66) 69.2,22.66 70.87,20.98 70.87,20.17 70.89,20.15 70.89,19.68 70.87,19.67 70.87,18.85 SW2.2 ; v1(61.78,22.84) 62.6,22.02 63.01,22.02 v1(63.43,21.59)
BT_ANT: length 39.5
  TOP w0.178: C4.2 60.94,20.09 ; 60.94,20.09 B1.1 ; 60.94,20.09 60.94,20.14 60.1,20.98 58.39,20.98 58.39,20.99 56.26,20.99 56.08,20.81 v1(55.48,20.81) ; v1(52.18,21.37) 51.42,22.13 43.85,22.13 43.67,21.95 36.32,21.95 36.32,21.95 35.18,21.95 35.18,21.95 29.96,21.95 29.89,22.01 28.2,22.01 27.87,21.68 27.83,21.68 27.11,20.96 27.11,19.77 27.87,19.01 R31.2
  BOTTOM w0.178: v1(55.48,20.81) 54.92,21.37 v1(52.18,21.37)
CC2541_RF_N: length 13.7
  TOP w0.178: v1(59.16,17.02) 59.16,16.97 59.36,16.78 59.36,16.48 59.37,16.46 U1.26 ; v1(61.51,20.82) 63.95,20.82 64.35,20.42 64.35,18.95 64.04,18.65 64.01,18.65 63.88,18.52 63.04,18.52 62.87,18.69 62.49,18.69 B1.3
  BOTTOM w0.178: v1(61.51,20.82) 60.61,19.91 60.61,17.99 60.07,17.44 59.59,17.44 v1(59.16,17.02)
CC2541_RF_P: length 7.1
  TOP w0.178: B1.4 v1(63.64,19.09) ; U1.25 59.87,16.23 59.93,16.29 v1(59.93,16.72) ; v1(60.97,17.4) v1(62.34,17.4)
  BOTTOM w0.178: v1(59.93,16.72) 60.35,17.14 60.4,17.14 60.66,17.4 v1(60.97,17.4) ; v1(62.34,17.4) 62.94,17.4 63.64,18.11 v1(63.64,19.09)
CHG: length 6
  TOP w0.178: U2.9 v1(32.06,14.98) ; LED5.2 32.75,19.62 33.1,19.26 33.12,19.26 33.28,19.1 33.28,19.08 33.4,18.96 v1(33.4,15.65)
  BOTTOM w0.178: v1(33.4,15.65) 32.74,14.98 v1(32.06,14.98)
DC: length 53.2
  TOP w0.178: v1(55.42,5.24) 55.42,4.6 56.1,3.92 67.68,3.92 69.89,6.12 v1(69.89,7.92) ; v1(53.45,8.39) 53.45,9.91 v1(54.03,10.49) ; U1.34 54.63,13.33 54.53,13.43 54.51,13.43 v1(54.08,13.85)
  BOTTOM w0.178: R8.1 83.38,21.48 83.38,20.76 83.25,20.63 J1.3 77.22,15.55 77.22,10.46 74.68,7.92 v1(69.89,7.92) ; v1(54.08,13.85) 54.08,12.87 54.03,12.82 v1(54.03,10.49) ; v1(55.42,5.24) 55.42,6.65 54.24,7.83 54.01,7.83 v1(53.45,8.39)
DD: length 57.8
  TOP w0.178: v1(68.27,5.57) 67.56,5.57 65.12,8.01 v1(65.12,8.41) ; U1.35 55.93,12.83 55.86,12.9 54.15,12.9 53.86,13.19 v1(52.74,13.19)
  BOTTOM w0.178: v1(65.12,8.41) 64.47,8.41 63.2,9.68 57.23,9.68 56.55,9 54.68,9 53.53,10.15 53.51,10.15 53.08,10.58 53.08,10.96 52.79,11.26 52.79,11.28 52.78,11.3 52.78,11.3 52.74,11.34 v1(52.74,13.19) ; J1.4 83.74,19.52 83.74,5.19 82.08,3.54 72,3.54 69.96,5.57 v1(68.27,5.57)
GPIO1: length 53.4
  TOP w0.178: v1(17.53,2.93) 17.15,3.31 v1(17.15,4.17) ; U6.3 v1(21.99,9.93)
  BOTTOM w0.178: v1(21.99,9.93) 16.79,9.93 14.51,7.64 14.51,5.05 15.4,4.17 v1(17.15,4.17) ; v1(17.53,2.93) 18.13,2.93 18.61,2.45 50.59,2.45 50.9,2.76 53.62,2.76 HEADER3.1
MC3210_INT: length 31.5
  TOP w0.178: v1(51.94,14.63) 51.94,14.33 51.93,14.31 51.93,13.69 51.81,13.57 51.81,12.8 51.93,12.69 51.93,12.45 51.94,12.43 51.94,11.47 ; R30.1 51.78,11.91 51.78,11.64 51.94,11.47 ; 51.94,11.47 51.94,11.29 v1(51.62,10.98) ; v1(52.93,16.6) 52.93,17.65 52.83,17.75 52.83,21.68 53.8,22.65 54.68,22.65 HEADER1.10 ; v1(51.88,8.28) 53.15,7.01 59.77,7.01 60.4,7.64 60.4,8.88 60.37,8.91 U1.7
  BOTTOM w0.178: v1(52.93,16.6) 51.99,16.6 U5.5 51.63,16.61 51.16,16.15 51.16,15.4 v1(51.94,14.63) ; v1(51.62,10.98) 51.62,10.38 51.45,10.21 51.45,8.71 v1(51.88,8.28)
MC3210_SCK: length 50.5
  TOP w0.178: U1.2 57.87,8.27 v1(57.18,7.58) 56.58,7.58 56.38,7.37 53.66,7.37 53.22,7.82 53.21,7.82 52.88,8.15 52.88,8.16 47.17,13.86 v1(47.17,14.69)
  BOTTOM w0.178: R29.1 47.76,13.17 47.17,13.17 v1(47.17,14.69) 47.17,15.34 48.44,16.61 U5.6 ; v1(57.18,7.58) 58.2,6.56 74.47,6.56 76.58,4.45 80.42,4.45 81.06,5.08 81.06,7.09 HEADER2.1
MC3210_SDA: length 41.1
  TOP w0.178: U1.3 58.37,8.79 v1(58.44,8.72)
  BOTTOM w0.178: U5.7 50.05,17.26 50.05,13.54 ; 50.05,13.54 50.37,13.21 50.41,13.21 52.1,11.52 52.1,11.47 52.43,11.14 52.43,11.11 52.73,10.82 52.73,10.43 53.36,9.79 53.38,9.79 54.54,8.64 56.19,8.64 56.68,8.15 57.87,8.15 v1(58.44,8.72) 58.44,8.06 59.59,6.92 78.7,6.92 HEADER2.2 ; 50.05,13.54 R28.1
NRST: length 18.8
  TOP w0.178: J1.7 v1(72.83,15.55) ; R9.2 v1(69.73,9.55)
  BOTTOM w0.178: v1(69.73,9.55) 70.48,10.3 70.48,13.2 v1(72.83,15.55)
P0_1/AD1: length 25.3
  TOP w0.178: v1(70.32,19.92) 70.32,23.07 68.49,24.9 64.14,24.9 HEADER1.3 ; v1(70.32,15.04) 69.64,14.37 66.72,14.37 65.92,15.17 64.76,15.17 63.42,13.83 U1.18
  BOTTOM w0.178: v1(70.32,19.92) v1(70.32,15.04)
P0_4/AD4: length 21.1
  TOP w0.178: U1.15 v1(64.22,12.33)
  BOTTOM w0.178: v1(64.22,12.33) 63,12.33 58.98,16.34 58.98,16.35 58.64,16.68 58.64,16.68 58.3,17.02 58.3,22.22 59.06,22.98 59.06,23.87 58.13,24.8 56.62,24.8 HEADER1.9
P0_5/AD5: length 22.4
  TOP w0.178: v1(64.22,11.57) 64.1,11.68 63.64,11.68 63.64,11.7 63.52,11.83 U1.14
  BOTTOM w0.178: HEADER1.11 54.34,24.54 54.34,23 54.98,22.36 56.65,22.36 57.82,21.19 57.82,18.46 57.79,18.44 57.79,17.09 57.82,17.07 57.82,16.99 63.24,11.57 v1(64.22,11.57)
P0_6/AD6: length 104
  TOP w0.178: v1(38.54,25.04) 38.54,25.79 v1(37.68,26.65) ; v1(66,1.1) 65.58,0.67 30,0.67 26.53,4.14 26.53,10.99 26.54,11 26.54,11.77 26.53,11.78 26.53,15.66 27.28,16.41 v1(27.28,17.2) ; U1.13 63.39,11.33 64.09,10.63 64.09,7.73 v1(67.19,4.63)
  BOTTOM w0.178: v1(37.68,26.65) 37.04,27.28 26.5,27.28 26.1,26.89 26.1,26.49 27.03,25.56 27.03,18.05 27.28,17.8 v1(27.28,17.2) ; v1(66,1.1) 66,3.43 v1(67.19,4.63) ; HEADER1.13 49.31,24.9 46.16,24.9 46.01,25.04 v1(38.54,25.04)
P0_7/AD7: length 109.9
  TOP w0.178: v1(65.88,4.94) 63.58,7.24 63.58,10.28 63.04,10.83 U1.12
  BOTTOM w0.178: v1(65.88,4.94) 66.45,5.52 67.22,5.52 70.93,1.81 83.19,1.81 86.67,5.29 86.67,24.06 83.42,27.31 66.75,27.31 66.67,27.39 64.56,27.39 64.54,27.4 40.01,27.4 40.01,27.4 39.19,27.4 38.83,27.05 38.83,26.38 39.3,25.91 40.01,25.91 40.06,25.96 44.56,25.96 44.97,26.37 46.74,26.37 47.15,25.96 HEADER1.15
P1_0: length 38.8
  TOP w0.178: v1(45.3,8.45) v1(45.3,17.37) ; U1.11 62.6,7.88 60.57,5.85 51.59,5.85 v1(51.56,5.82) ; HEADER1.16 45.92,23.42 v1(45.3,22.8)
  BOTTOM w0.178: v1(51.56,5.82) 47.93,5.82 v1(45.3,8.45) ; v1(45.3,17.37) v1(45.3,22.8)
P1_1: length 35.1
  TOP w0.178: v1(46.31,17.71) 46.31,10.3 47.95,8.66 v1(49.07,8.66) ; U1.9 61.37,7.44 60.23,6.29 52.51,6.29 51.79,7.01 v1(49.07,7.01)
  BOTTOM w0.178: v1(46.31,17.71) 46.73,18.13 46.73,19.78 HEADER1.14 ; v1(49.07,7.01) v1(49.07,8.66)
P1_2: length 36.9
  TOP w0.178: v1(50.56,7.98) 51.18,7.37 52.23,7.37 52.95,6.65 59.98,6.65 60.87,7.54 U1.8 ; v1(44.72,10.68) v1(44.72,15.27)
  BOTTOM w0.178: v1(44.72,15.27) 46.53,17.07 46.79,17.07 47.58,17.86 47.58,18.7 50.5,21.62 50.5,21.65 51.51,22.65 52.14,22.65 HEADER1.12 ; v1(44.72,10.68) 47.86,10.68 v1(50.56,7.98)
P1_6: length 28.6
  TOP w0.178: v1(53.36,11.49) 53.78,11.07 55.02,11.07 55.25,11.29 55.47,11.29 55.5,11.33 U1.38 ; HEADER1.4 62.97,23.32 62.97,23.02 61.81,21.85 55.21,21.85 54.58,21.22 54.58,21.2 53.82,20.44 53.82,20.24 v1(53.4,19.82) ; 49.95,19.54 51.92,17.57 v1(51.92,15.68) ; 49.95,19.54 LED3.2 ; 49.95,19.54 50.19,19.54 50.19,19.77 v1(50.85,19.77)
  BOTTOM w0.178: v1(51.92,15.68) 53.45,14.14 53.45,12.18 53.36,12.09 v1(53.36,11.49) ; v1(53.4,19.82) 52.8,19.82 52.78,19.79 52.68,19.79 52.65,19.77 v1(50.85,19.77)
P1_7: length 32.1
  TOP w0.178: v1(54.66,18.98) 54.66,20.77 54.94,21.06 54.94,21.07 55.25,21.38 59.61,21.38 59.62,21.39 62.06,21.39 63.03,22.36 64.55,22.36 HEADER1.2 ; v1(55.24,11.97) 55.38,11.83 U1.37 ; LED2.2 v1(51.07,20.53)
  BOTTOM w0.178: v1(55.24,11.97) 57.89,14.62 57.89,16.41 57.46,16.84 57.46,16.92 57.44,16.95 57.44,17.97 56.42,18.99 55.26,18.99 55.25,18.98 v1(54.66,18.98) 54.66,19.58 54.54,19.69 54.54,20.07 54.08,20.53 v1(51.07,20.53)
P2_0: length 15.9
  TOP w0.178: U1.36 55.92,12.33 55.71,12.54 54.79,12.54 54.31,12.06 52.81,12.06 52.28,12.59 52.28,12.84 52.17,12.95 52.17,13.42 52.28,13.54 52.28,14.16 52.51,14.39 52.51,14.87 52.49,14.89 52.49,15.91 52.28,16.12 52.28,18 51.64,18.65 51.64,20.78 50.87,21.54 LED1.2
PG: length 4
  TOP w0.178: U2.7 30.84,13.54 31.02,13.36 31.02,11.55 31.39,11.18 LED4.2
PWM: length 67.9
  TOP w0.178: v1(3.78,6.98) 3.96,7.16 3.96,12.73 U6.26
  BOTTOM w0.178: v1(3.78,6.98) 3.78,5.86 5.29,4.35 6.66,4.35 7.7,3.31 10.16,3.31 10.43,3.57 19.62,3.57 20.29,2.91 50.09,2.91 50.69,3.51 60.23,3.51 HEADER3.8
SIM800_PK: length 86.8
  TOP w0.178: v1(45.27,24.47) 45.86,24.47 45.88,24.49 59.14,24.49 v1(59.62,24.97) ; v1(69.02,21.75) 69.02,23 67.52,24.49 61.6,24.49 HEADER1.6 59.84,22.73 59.68,22.66 58.74,22.66 ; U1.5 59.37,8.79 v1(59.3,8.72) ; R43.1 18.4,23.19 19.16,23.96 19.16,26.5 20.05,27.39 39.78,27.39 40.31,26.86 40.31,26.86 42.18,24.99 42.18,24.89 v1(42.6,24.47)
  BOTTOM w0.178: v1(69.02,21.75) 69.02,10.25 66.6,7.84 64.26,7.84 62.81,9.29 59.87,9.29 v1(59.3,8.72) ; v1(59.62,24.97) 59.62,24.34 HEADER1.6 ; v1(42.6,24.47) v1(45.27,24.47)
SIM800_RST: length 121.6
  TOP w0.178: v1(83.13,19.03) 84.62,19.03 85.89,20.3 85.89,23.47 82.33,27.03 63.15,27.03 62.01,27.03 ; v1(59.83,7.93) 59.87,7.97 U1.6 ; 62.01,27.03 46.34,27.03 42.83,23.52 40.04,23.52 39.21,22.7 30.21,22.7 30.19,22.72 28.85,22.72 27.87,22.72 25.05,19.91 25.05,19.87 24.54,19.36 24.54,17 24.06,16.51 22.84,16.51 v1(22.46,16.9) ; 62.01,27.03 61.68,26.7 61.68,25.56 60.61,24.49 60,24.49 59.52,24.01 59.52,23.86 59.09,23.42 HEADER1.8
  BOTTOM w0.178: v1(22.46,16.9) 21.83,17.53 19.9,17.53 18.93,16.57 18.93,15.78 19.11,15.6 v1(19.21,15.6) ; v1(83.13,19.03) 81.9,19.03 77.58,14.71 77.58,10.27 74.66,7.35 60.42,7.35 v1(59.83,7.93)
SIM800_RXD: length 37.5
  TOP w0.178: R32.1 23.29,18.16 23.29,18.59 v1(22.69,19.19) ; v1(2.93,8.18) 2.23,7.48 2.23,6.16 2.87,5.53 U6.31
  BOTTOM w0.178: v1(22.69,19.19) 22.09,19.19 21.67,18.77 20.6,18.77 11.52,9.69 11.52,5.36 11.01,4.85 11.01,4.66 10.28,3.93 10.28,3.93 10.05,3.7 8.09,3.7 7.86,3.93 7.84,3.93 3.59,8.18 v1(2.93,8.18)
SIM800_TXD: length 47.1
  TOP w0.178: U6.32 6.59,5.43 5.7,4.55 5.7,4.08 v1(5.28,3.66) ; R33.1 15,22.28 14.11,23.17 14.11,26.11 13.78,26.45 4.12,26.45 1.28,23.6 1.28,5.32 1.92,4.68 1.92,4.64 v1(2.59,3.97)
  BOTTOM w0.178: v1(5.28,3.66) 4.86,3.24 3.31,3.24 v1(2.59,3.97)
SIM_CLK: length 21.3
  BOTTOM w0.178: 23.2,21.42 23.37,21.42 R41.2 ; 23.2,21.42 23.2,21.27 22.87,20.94 22.8,20.94 22.08,20.22 22,20.22 21.39,19.61 20.3,19.61 16.39,15.7 12.05,15.7 10.3,17.45 U7.3 ; 23.2,21.42 22.38,22.23 21.16,22.23 20.57,22.82 U8.4
SIM_DATA: length 58.9
  TOP w0.178: v1(6.89,3.05) 8.59,3.05 v1(9.81,4.27) ; v1(5.28,1.92) 4.53,2.67 2.93,2.67 v1(2.24,1.99) ; v1(15.86,23.98) 15.86,25.7 14.44,27.13 3.98,27.13 2.03,25.18 v1(1.43,25.18)
  BOTTOM w0.178: C31.1 18.63,23.79 18.63,23.78 ; U7.6 9.81,5.86 v1(9.81,4.27) ; U8.5 20.16,23.63 18.77,23.63 18.63,23.78 ; 18.63,23.78 17.13,22.28 R42.2 16.95,22.89 v1(15.86,23.98) ; v1(2.24,1.99) 1.35,2.87 1.35,22.17 1.38,22.19 1.38,24.52 1.43,24.58 v1(1.43,25.18) ; v1(5.28,1.92) 6.41,3.05 v1(6.89,3.05)
SIM_RST: length 18.5
  BOTTOM w0.178: U7.2 12.32,18.89 12.32,20.64 11.79,21.17 11.79,21.21 12.23,21.21 15.65,24.63 19.54,24.63 19.56,24.62 20.9,24.62 21.22,24.3 21.22,22.96 21.35,22.82 U8.3 22.54,22.82 22.68,22.69 22.9,22.9 23.29,22.9 23.76,23.38 R40.2
SINK0: length 47
  TOP w0.178: v1(49.98,12.64) 49.98,11.64 51.34,10.28 51.73,10.28 v1(52.15,9.86) ; U6.47 19.06,13 18.86,13 v1(18.44,12.58)
  BOTTOM w0.178: HEADER3.4 56.55,7.07 55.33,8.28 54.39,8.28 53.24,9.44 52.58,9.44 v1(52.15,9.86) ; v1(49.98,12.64) 49.56,12.22 45.83,12.22 45.19,12.86 31.27,12.86 28.49,10.09 26.07,10.09 23.58,12.58 v1(18.44,12.58)
SINK1: length 41.9
  TOP w0.178: v1(46.4,4.16) 49.24,4.16 v1(49.99,4.91) ; U6.46 19.44,11.33 20.09,10.67 20.09,10.55 20.15,10.49 20.15,6.53 20.34,6.35 21.15,6.35 21.24,6.25 21.27,6.25 22.17,5.35 v1(22.17,3.82)
  BOTTOM w0.178: v1(46.4,4.16) 45.61,3.37 22.62,3.37 v1(22.17,3.82) ; HEADER3.2 v1(49.99,4.91)
STATUS: length 41.9
  TOP w0.178: U6.4 21.09,11.33 21.74,10.67 22.22,10.67 22.56,10.33 22.56,10.32 23.47,9.41 24.69,9.41 24.86,9.58 v1(25.46,9.58) ; HEADER3.3 55.61,1.43 30.65,1.43 v1(27.69,4.39)
  BOTTOM w0.178: v1(27.69,4.39) 27.26,4.82 27.26,7.78 v1(25.46,9.58)
USART_RXD: length 76.3
  TOP w0.178: v1(36.89,25.76) 36.89,26.36 36.21,27.03 20.29,27.03 19.66,26.4 19.66,23.04 18.91,22.29 R33.2 ; U1.17 63.56,13.33 65.04,14.81 65.75,14.81 66.65,13.92 66.65,13.62 v1(66.73,13.53) R5.1 ; HEADER1.5 59.6,25.96 58.53,24.9 46.96,24.9 v1(46.31,25.55)
  BOTTOM w0.178: v1(46.31,25.55) 39.18,25.55 39.18,25.56 39.15,25.56 38.95,25.76 v1(36.89,25.76) ; v1(66.73,13.53) 67.54,14.34 67.54,18.61 67.31,18.84 67.31,19.8 67.31,19.81 67.31,26.25 66.61,26.95 66.6,26.95 66.53,27.03 64.71,27.03 64.35,26.67 64.35,25.35 63.69,24.69 61.81,24.69 HEADER1.5
USART_TXD: length 63.6
  TOP w0.178: R6.1 65.49,13.5 v1(65.49,14.24) 65.17,14.24 64.86,13.94 64.86,13.84 63.85,12.83 U1.16 ; R32.2 23.65,17.57 23.68,17.57 23.99,17.88 23.99,19.59 27.49,23.09 38.49,23.09 39.56,24.16 v1(39.56,26.67)
  BOTTOM w0.178: v1(39.56,26.67) 40.2,26.67 40.56,27.03 56.93,27.03 HEADER1.7 58.77,25.19 58.77,24.69 59.42,24.04 59.42,23.01 59.9,22.53 59.9,22.53 60.51,21.92 61.63,21.92 62.32,21.23 62.32,18.58 61.54,17.8 61.54,17.11 62.21,16.43 62.21,16.27 62.15,16.21 62.15,15.73 62.21,15.67 62.21,15.51 63.48,14.24 v1(65.49,14.24)
USB_5V: length 119.4
  TOP w0.178: U6.7 21.09,15.53 22.39,14.23 22.39,12.07 23.4,11.05 24.57,11.05 25.04,11.52 25.04,11.62 25.37,11.96 25.38,11.96 25.38,13.99 v1(25.53,14.13) ; 33.13,20.47 33.67,21.01 C30.1 35.17,21.38 35.17,21.44 35.33,21.6 36.17,21.6 36.17,21.59 38.09,21.59 38.56,21.12 C17.1 ; 33.13,20.47 v1(33.08,20.47) ; 33.13,20.47 34.21,19.38 C16.1 34.98,19.38 35.85,18.52 35.85,15.8 36.44,15.22 38.46,15.22 v1(41.44,12.24) ; v1(28.22,11.17) 27.8,10.74 27.8,5.59 30.59,2.8 39.12,2.8 v1(41.81,5.49) ; 71.77,8.84 71.77,7.42 67.96,3.61 67.88,3.61 67.83,3.56 55.95,3.56 55.9,3.61 52.93,3.61 50.9,5.64 v1(50.9,6.39) ; 71.77,8.84 R17.1 ; 71.77,8.84 69.08,11.53 R21.2
  BOTTOM w0.178: 41.44,12.27 41.44,12.3 41.28,12.14 41.28,6.02 v1(41.81,5.49) ; 41.44,12.27 44.38,9.33 45.59,9.33 48.52,6.39 v1(50.9,6.39) ; 41.44,12.27 v1(41.44,12.24) ; v1(25.53,14.13) 25.53,13.9 28.22,11.21 ; R15.2 29.85,13.08 29.85,12.69 28.37,11.21 28.22,11.21 ; 28.22,11.21 v1(28.22,11.17) ; v1(31.56,17.25) 32.31,17.25 32.56,17 J2.1 33.08,18.16 33.31,18.39 33.31,19.64 33.08,19.87 v1(33.08,20.47)
USB_DM: length 30.3
  TOP w0.178: v1(32.32,21.11) 31.15,21.11 v1(30.97,21.29)
  BOTTOM w0.178: R38.1 28.21,15.47 28.48,15.74 28.48,16.43 28.74,16.68 28.74,16.85 29.1,17.22 29.1,18.18 29.59,18.67 30.51,18.67 30.69,18.84 30.69,20.92 30.7,20.93 30.7,21.02 v1(30.97,21.29) ; v1(32.32,21.11) 33.24,21.11 33.65,20.7 33.65,20.21 33.66,20.19 33.66,19.77 33.73,19.7 J2.2 33.73,16.13 33.97,15.88 33.97,15.86 36.12,15.86 37.64,17.38 37.64,20.6 38.18,21.15 38.18,21.15 38.34,21.31 39.51,21.31 39.84,20.98 39.84,20.98 40.56,20.27 40.56,18.79 TP5.1 40.59,18.64 40.59,17.73 40.41,17.73 D1.2
USB_DP: length 45.8
  TOP w0.178: v1(43.92,22.7) 39.91,22.7 39.52,22.31 36.47,22.31 36.46,22.31 35.03,22.31 35.03,22.31 30.1,22.31 30.04,22.37 28.01,22.37 25.41,19.76 TP6.1 ; v1(39.65,16.31) 38.2,17.76 v1(36.71,17.76)
  BOTTOM w0.178: v1(43.92,22.7) 43.92,21.03 43.4,20.51 42.13,20.51 41.3,21.34 39.98,21.34 39.66,21.67 38.19,21.67 36.96,20.44 36.49,20.44 34.38,18.32 34.38,18.32 ; R39.1 25.03,15.93 25.41,16.31 TP6.1 ; 34.38,18.32 J2.3 ; 34.38,18.32 36.16,18.32 v1(36.71,17.76) ; v1(39.65,16.31) D2.2
VSIM: length 19
  TOP w0.178: v1(18.33,20.74) 19.29,21.69 19.33,21.69 19.64,22 21.59,22 22.28,22.69 22.28,22.79 22.28,23.65 22.89,24.26 v1(23.85,24.26) 23.85,24.26 23.15,24.26 C29.2 ; U6.16 12.72,19.73 12.72,20.43 13,20.7 v1(13,20.74)
  BOTTOM w0.178: v1(13,20.74) 15.38,20.74 ; 15.38,20.74 U7.1 ; 15.38,20.74 v1(18.33,20.74) ; v1(23.85,24.26) 23,24.26 22.86,24.12 U8.1
N12835: length 12.9
  TOP w0.178: U1.33 54.99,13.83 54.35,14.46 54.35,16.62 56.2,18.47 Y1.1 56.2,19.68 56.74,20.22 56.76,20.22 57.17,20.63 58.24,20.63 58.25,20.62 59.37,20.62 59.77,20.22 59.81,20.22 C1.1
N12841: length 9.4
  TOP w0.178: C2.1 57.71,19.1 ; 57.71,19.1 Y1.2 ; 57.71,19.1 57.71,18.03 54.81,15.14 54.81,14.58 55.07,14.33 U1.32
N13149: length 11
  TOP w0.178: R4.1 65.59,19.08 64.32,17.81 62.75,17.81 62.58,17.98 60.17,17.98 60.16,17.97 58.81,17.97 58.79,17.95 58.78,17.95 58.24,17.41 58.24,17.39 57.37,16.53 U1.30
N13333: length 9.9
  TOP w0.178: U1.40 55.93,10.33 55.66,10.05 55.47,10.05 v1(55.05,9.63)
  BOTTOM w0.178: C3.2 57.51,15.67 57.51,15.38 54.63,12.49 54.63,10.05 v1(55.05,9.63)
N14357: length 7.4
  TOP w0.178: Y2.1 66.97,17.17 C6.1 63.15,17.17 62.81,16.83 62.27,16.83 62.26,16.82 61.3,16.82 60.88,16.4 60.88,15.93 60.87,15.92 U1.23
N14367: length 23.1
  TOP w0.178: C5.2 68.56,18.09 68.92,17.73 68.92,16.65 68.13,15.86 ; v1(69.59,20.58) 69.16,21 65.75,21 v1(65.12,20.38) ; U1.22 61.37,16.27 61.57,16.46 62.41,16.46 62.42,16.47 62.51,16.47 62.51,16.48 63.01,16.48 63.34,16.81 64.2,16.81 64.52,16.49 v1(65.12,16.49) ; 68.13,15.86 Y2.3 ; 68.13,15.86 v1(69.59,15.86)
  BOTTOM w0.178: v1(65.12,16.49) v1(65.12,20.38) ; v1(69.59,20.58) v1(69.59,15.86)
N19377: length 11.9
  TOP w0.178: U1.20 63.09,15.32 v1(63.38,15.32) ; v1(66.01,9.55) R9.1 66.75,10.55 R7.1
  BOTTOM w0.178: v1(66.01,9.55) 66.73,10.28 66.73,11.54 ; 66.73,11.54 C7.1 ; 66.73,11.54 66.73,12.56 66.06,13.24 66.06,14.54 65.17,15.43 64.32,15.43 64.3,15.41 64.07,15.41 63.98,15.32 v1(63.38,15.32)
N42343: length 23.9
  TOP w0.178: C4.1 60.98,19.1 61.75,18.33 62.72,18.33 62.89,18.16 64.03,18.16 64.08,18.22 64.17,18.22 66.1,20.14 ; L1.2 66.1,20.12 66.1,20.14 ; A1.1 79.69,19.54 77.19,17.05 72.17,17.05 69.36,19.85 69.35,19.85 69.02,20.19 69.02,20.2 68.57,20.65 66.6,20.65 66.1,20.15 66.1,20.14
N47831: length 4.1
  TOP w0.178: v1(32.77,4.32) 32.75,4.35 32.75,5.54 32.32,5.97 U3.2
  BOTTOM w0.178: R24.1 32.96,5.08 33.12,4.92 33.12,4.67 v1(32.77,4.32)
N59946: length 63.2
  TOP w0.178: Q2.3 v1(6.16,21.96) ; v1(3.74,2.06) 4.16,1.64 4.16,1.59 4.43,1.33 21.7,1.33 23.3,2.93 23.3,4.88 v1(24.14,5.72) ; v1(18.73,14.33) 19.13,14.33 U6.48
  BOTTOM w0.178: v1(18.73,14.33) 18.07,14.33 17.1,13.36 17.1,12.07 18.14,11.03 18.14,10.98 18.32,10.8 22.28,10.8 23.26,9.82 23.26,9.75 23.6,9.42 23.67,9.42 24.14,8.95 v1(24.14,5.72) ; v1(3.74,2.06) 3.15,2.06 1.76,3.45 1.76,17.56 v1(6.16,21.96)
N60165: length 15.8
  TOP w0.178: R43.2 14.68,23.19 v1(14.68,24.76) ; R44.1 v1(13.52,24.76) 6.79,24.76 5.01,22.98 5.01,22.19 4.76,21.94 Q2.2
  BOTTOM w0.178: v1(14.68,24.76) v1(13.52,24.76)
N62144: length 42.8
  TOP w0.178: U6.19 7.17,20.55 4.41,20.55 4.2,20.33 3.47,20.33 3.07,20.73 3.07,24.31 4.55,25.79 v1(13.54,25.79)
  BOTTOM w0.178: v1(13.54,25.79) 18.71,25.79 19.53,26.61 23.32,26.61 26.68,23.25 R38.2
N62148: length 24.3
  TOP w0.178: U6.59 7.99,17.96 v1(8.26,17.68)
  BOTTOM w0.178: R39.2 24.08,16.33 24.52,16.77 24.52,19.18 23.83,19.87 22.15,19.87 21.49,19.21 20.53,19.21 16.26,14.94 11.01,14.94 v1(8.26,17.68)
N62630: length 7.2
  TOP w0.178: U6.14 14.99,20.55 16.63,20.55 17.03,20.94 17.03,21.48 16.63,21.88 15.19,21.88 v1(15.02,21.71)
  BOTTOM w0.178: R42.1 15.32,22.28 15.02,21.98 v1(15.02,21.71)
N62665: length 12
  TOP w0.178: v1(14,17.66) 13.59,18.08 U6.55 ; v1(20.51,21.04) 21.2,21.04 21.23,21.07 21.71,21.07 21.75,21.04 22.87,21.04 v1(23.35,20.55)
  BOTTOM w0.178: v1(14,17.66) 14.43,17.24 16.71,17.24 v1(20.51,21.04)
N62680: length 15.1
  TOP w0.178: v1(19.51,21.1) 20.05,21.65 22.84,21.65 23.62,22.43 24.74,22.43 24.79,22.38 v1(25.38,22.38) ; U6.15 13.59,20.57 13.98,20.96 15.19,20.96 15.54,21.31 v1(16.14,21.31)
  BOTTOM w0.178: v1(25.38,22.38) 24.79,22.38 24.74,22.43 R40.1 ; v1(16.14,21.31) 19.31,21.31 v1(19.51,21.1)
N65838: length 11.1
  TOP w0.178: U6.64 v1(6.79,12.73)
  BOTTOM w0.178: v1(6.79,12.73) 6.79,17.49 9.58,20.28 9.72,20.28 v1(11.08,21.65)
N65858: length 6.6
  TOP w0.178: Q1.2 8.92,20.79 12.08,20.79 12.28,20.99 R36.2 R37.1
N67494: length 53.5
  TOP w0.178: C26.1 18.61,25.05 18.44,25.22 v1(17.56,25.22) ; v1(26.14,24.92) 26.82,24.25 30.57,24.25 v1(31,24.67) ; v1(24.91,26.25) 22.19,26.25 v1(21.15,25.22) ; A2.1 47.83,17.25 46.43,18.65 45.85,18.65 43.19,21.32 v1(42.59,21.32)
  BOTTOM w0.178: v1(24.91,26.25) 25.72,25.44 25.72,25.34 v1(26.14,24.92) ; v1(21.15,25.22) v1(17.56,25.22) ; 37.45,22.05 37.45,23.91 36.89,24.46 31.8,24.46 31.59,24.67 v1(31,24.67) ; 37.45,22.05 32.11,22.05 31.69,21.63 31.69,21.27 31.69,21.27 31.69,20.96 31.05,20.32 31.05,18.67 30.69,18.31 29.74,18.31 29.46,18.03 29.46,17.08 29.09,16.71 29.09,15.4 28.2,14.51 R34.1 ; 37.45,22.05 41.85,22.05 v1(42.59,21.32)
N67529: length 41
  TOP w0.178: 24.62,25.05 22.63,25.05 21.73,24.16 C27.1 ; 24.62,25.05 25.15,25.58 26.91,25.58 TP4.1 ; 24.62,25.05 24.62,24.5 v1(24.8,24.32) ; R31.1 26.92,17.78 26.52,17.38 26.52,17.03 v1(26.1,16.6) 26.1,11.7 26.18,11.62 26.18,11.15 26.1,11.06 26.1,9.14 24.45,7.48 v1(22.92,7.48) ; U6.40 18.15,5.53 v1(18.15,4.52)
  BOTTOM w0.178: v1(22.92,7.48) 22.92,6.34 22.03,5.45 19.07,5.45 v1(18.15,4.52) ; R34.2 26.1,14.51 v1(26.1,16.6) 26.22,16.73 26.22,22.89 v1(24.8,24.32)
N77579: length 8.9
  TOP w0.178: L3.1 34.35,7.95 R25.2 32.87,7.46 32.71,7.3 29.52,7.3 ; U4.3 29.52,7.84 29.52,7.3 ; v1(29.52,6.73) 29.52,7.3
  BOTTOM w0.178: R23.1 30.03,7.83 29.52,7.32 v1(29.52,6.73)
N88391: length 1.1
  TOP w0.178: LED2.1 R2.2
N88395: length 1.1
  TOP w0.178: R1.2 48.68,21.52 LED1.1
N88411: length 1.1
  TOP w0.178: LED3.1 R3.2
N122459: length 13.9
  TOP w0.178: 28.42,16.08 28.38,16.08 v1(27.85,16.61) ; 28.42,16.08 28.42,15.58 U2.3 ; 28.42,16.08 U2.2
  BOTTOM w0.178: C19.1 29.93,23.75 29.78,23.75 ; 29.78,23.75 27.94,21.91 27.94,18.66 28.75,17.84 28.75,17.37 28.41,17.04 28.28,17.04 v1(27.85,16.61) ; 29.78,23.75 29.65,23.88 BAT1.1
N122468: length 15.4
  TOP w0.178: v1(28.18,17.61) 28.18,17.23 28.48,16.93 28.48,16.93 28.83,16.58 U2.1
  BOTTOM w0.178: v1(28.18,17.61) 27.58,18.2 27.58,23.98 27.62,24.02 27.62,25.14 28.36,25.88 28.36,26.35 28.84,26.83 31.02,26.83 BAT1.2
N122830: length 3.4
  TOP w0.178: v1(28.21,13.37) 29.59,13.37 29.84,13.62 U2.5
  BOTTOM w0.178: v1(28.21,13.37) 28.96,13.37 R15.1
N123132: length 2.5
  TOP w0.178: U2.6 30.34,13.52 29.46,12.65 R14.1
N128065: length 1
  TOP w0.178: R11.1 31.75,19.66 LED5.1
N128069: length 1
  TOP w0.178: R10.1 32.93,11.19 LED4.1
N477050: length 4.2
  TOP w0.178: v1(34.35,7.05) 34.35,6.17 34.15,5.97 U3.5
  BOTTOM w0.178: L2.2 32.91,7.09 32.91,7.12 33.26,7.47 33.93,7.47 v1(34.35,7.05)
N546190: length 4.4
  TOP w0.178: U2.12 32.4,16.91 32.4,17.63 32.01,18.01 31.43,18.01 31.1,18.34 31.1,19.05 31.1,19.28 30.79,19.59 R19.2
N547230: length 8.5
  TOP w0.178: U2.16 29.29,17.3 28.45,18.14 28.45,18.93 27.8,19.59 27.8,21.09 28.37,21.66 29.74,21.66 30.34,21.06 R20.2
N547391: length 1.4
  TOP w0.178: U2.14 30.84,17.36 30.75,17.45 30.75,17.84 30.74,17.84 30.74,18.43 R18.1
N658042: length 1.6
  TOP w0.178: R35.1 11.35,22.68 10.07,22.68 Q1.3
N659580: length 2.1
  TOP w0.178: LED6.2 12.88,23.6 12.88,22.61 R35.2
N773363: length 3.4
  TOP w0.178: R27.2 31.28,10.67 32.21,9.74 ; 32.21,9.74 U4.5 ; 32.21,9.74 33.05,8.9 R25.1
N1023186: length 21.3
  TOP w0.178: U6.56 12.19,18.13 v1(11.72,17.66) ; C28.1 23,13.29 23,14.28 21.8,15.47 21.8,18.89 21.89,18.98 21.89,20.08 v1(21.47,20.5)
  BOTTOM w0.178: v1(21.47,20.5) 21.05,20.08 20.16,20.08 16.87,16.79 12.58,16.79 v1(11.72,17.66)
N1278610: length 7
  TOP w0.178: R16.1 v1(71.05,8.49)
  BOTTOM w0.178: v1(71.05,8.49) 71.1,8.49 SW1.1
N1278612: length 15
  TOP w0.178: SW1.3 77.53,12.17 72.7,12.17 72.45,11.92 72.45,10.19 73.21,9.43 77.99,9.43 R17.2
N1284310: length 6.7
  TOP w0.178: R21.1 67.72,13.06 68.23,13.57 SW2.1
N1284312: length 2.4
  TOP w0.178: R22.2 80.53,13.57 SW2.3

## Copper pours and planes (outline as drawn; the poured copper is in the pictures)
DGND on GND: 87.44,1 87.31,0.69 87,0.56 1,0.56 0.69,0.69 0.56,1 0.56,27 0.69,27.31 1,27.44 87,27.44 87.31,27.31 87.44,27
DVDD2V8 on POWER: 87.44,1 87.31,0.69 87,0.56 1,0.56 0.69,0.69 0.56,1 0.56,27 0.69,27.31 1,27.44 87,27.44 87.31,27.31 87.44,27

## Text on the board
Ref Des/Silkscreen Top: CC2541 | SIM800L | BQ24072 | PORTS&AN | Main Board V0.1
DISPLAY_TOP: FIGURE | SIZE | 12.0 | 23.622 | 33.465 | 41.339 | DRILL CHART: TOP to BOTTOM | ALL UNITS ARE IN MILS | PLATED | QTY | 256 | 7 | 20 | 34
